# Altium PCB EE194_PCB.PcbDoc
Units mil, origin at the board's own origin, x right, y up, seen from the top; angles counter-clockwise.
Board outline 6000 x 4000 mil, 2 copper layers (Top Layer, Bottom Layer); 85 components, 41 nets, 267 pads, 366 vias.
Unrouted connection lines stored in the file: 91.
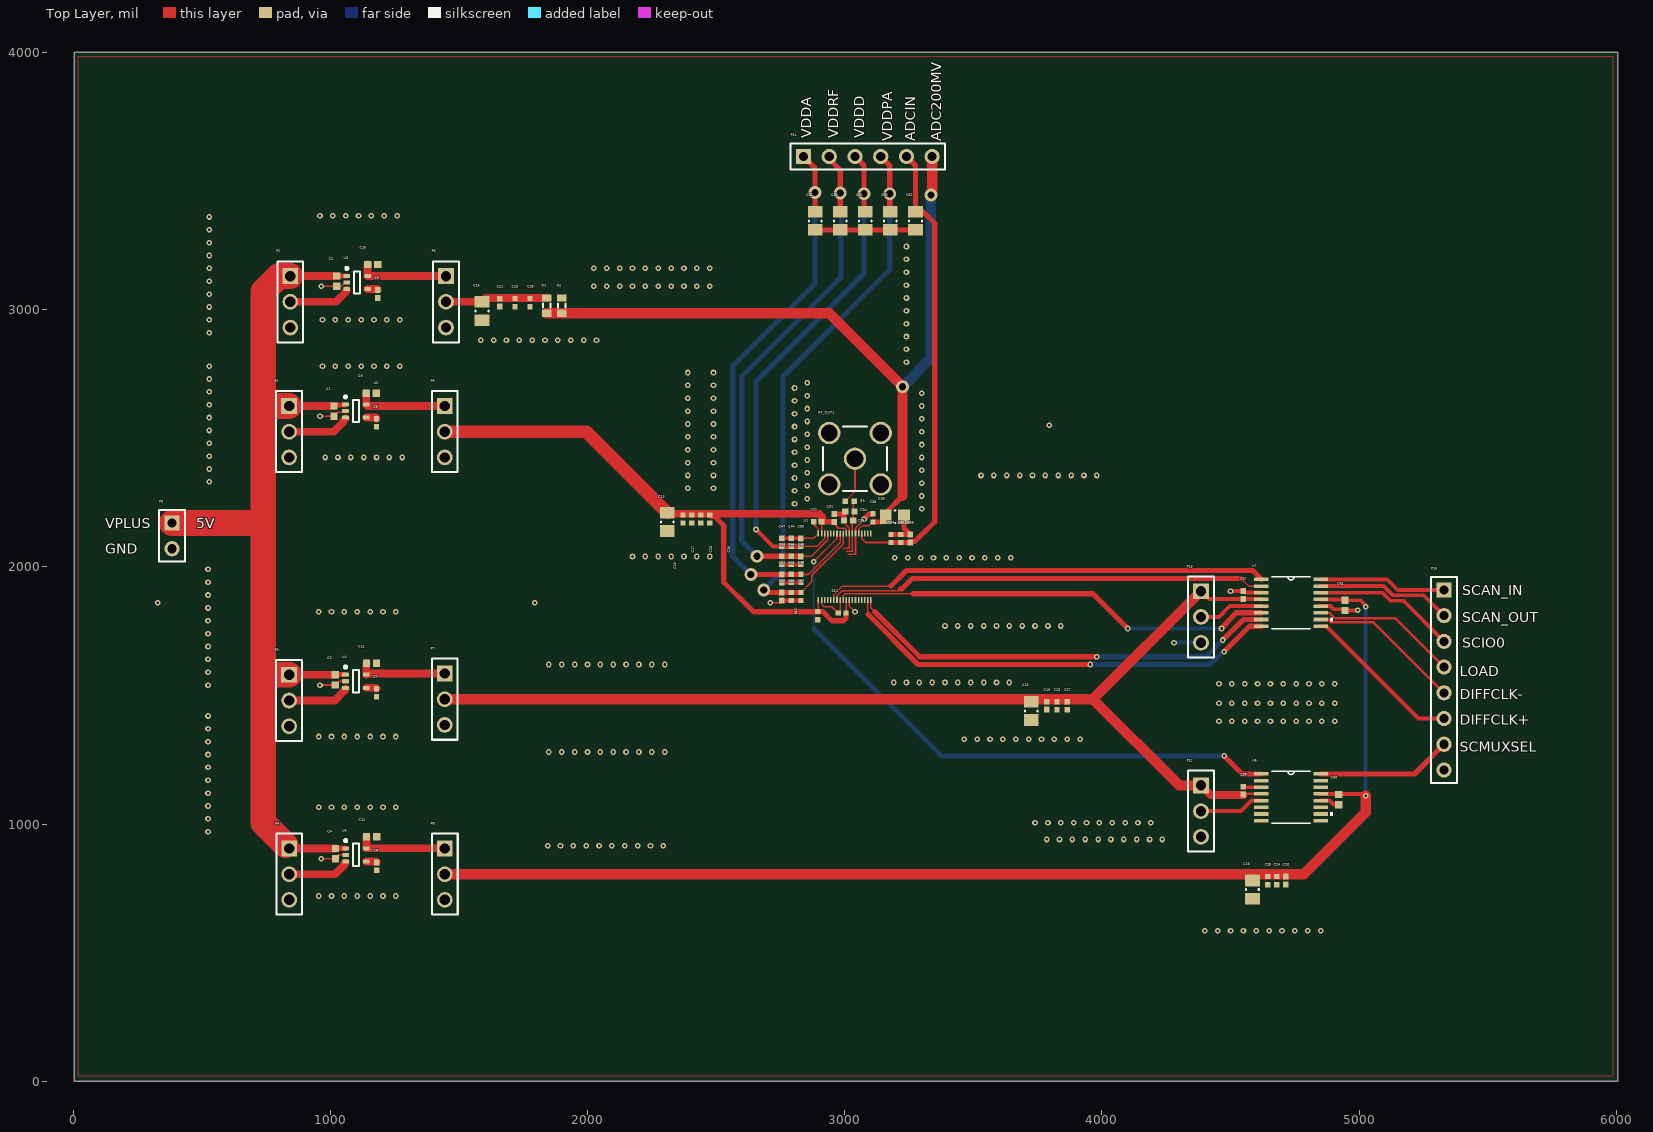
[diagram p0: Top Layer view]
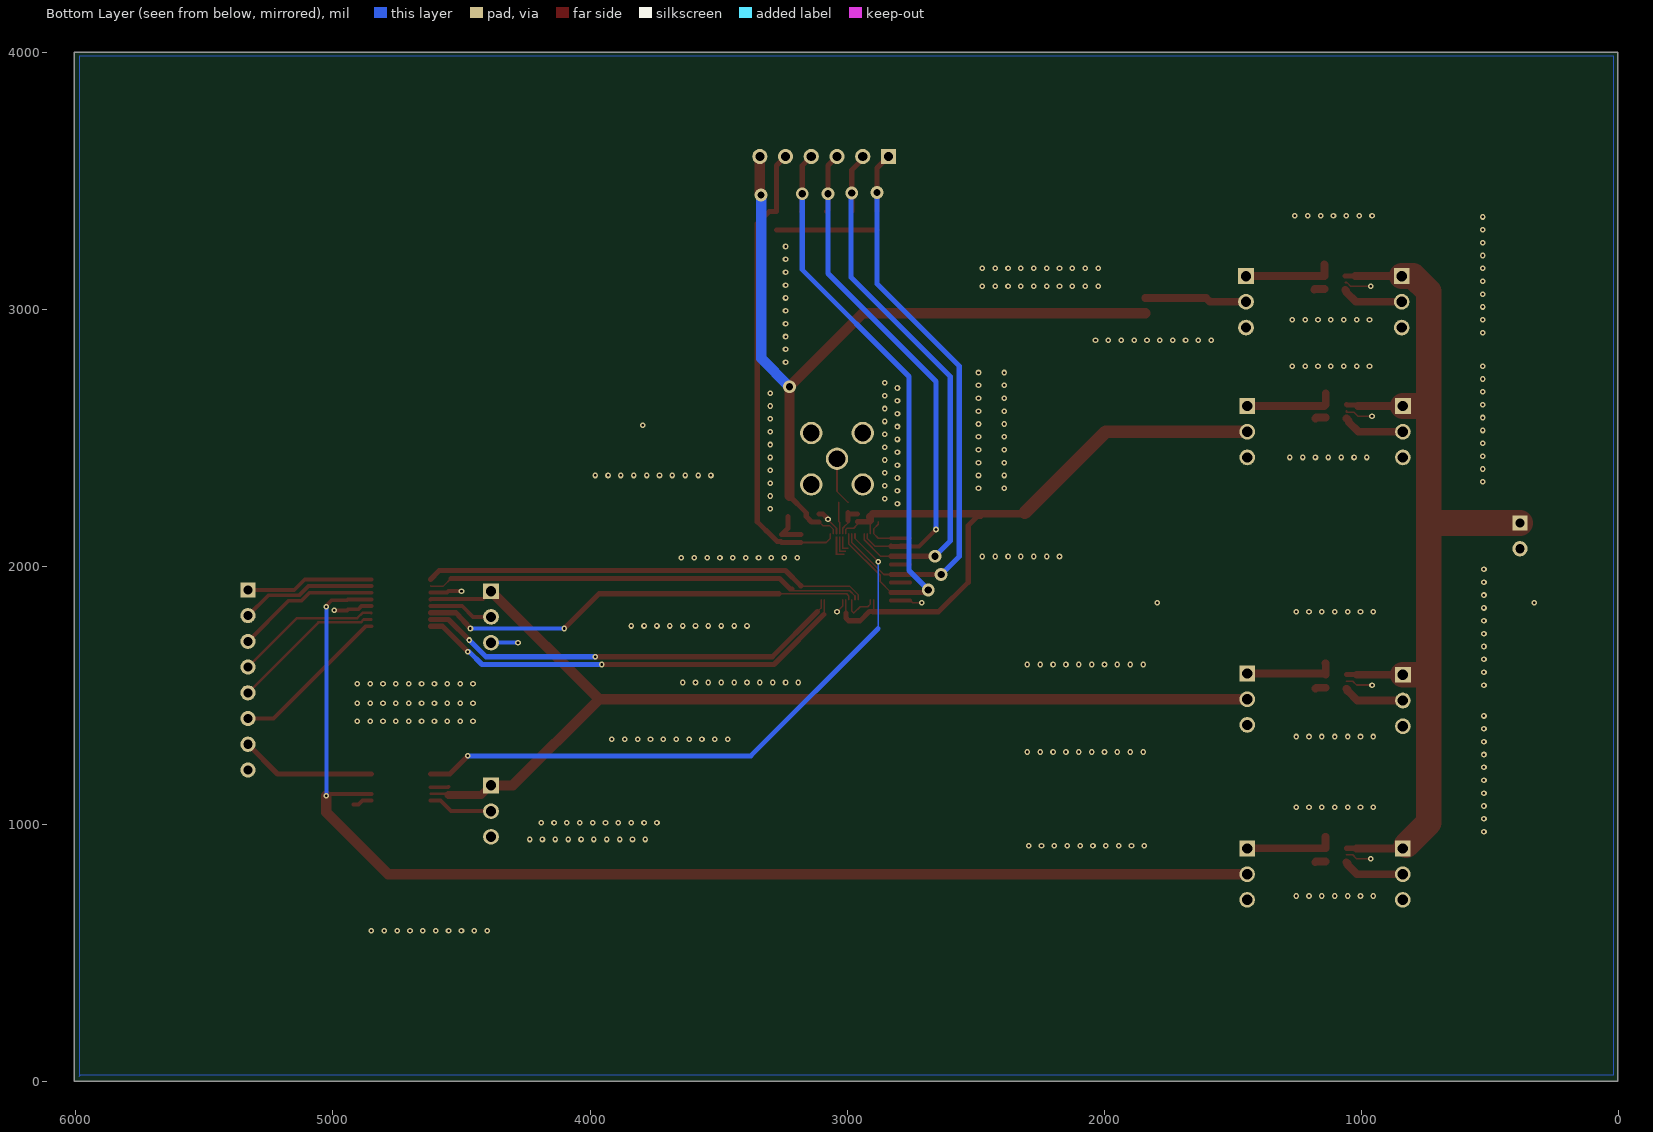
[diagram p1: Bottom Layer view, seen from below]

## Layer stack, top to bottom
Top Solder: solder mask 0.4, Solder Resist, Dk 3.5
Top Layer: signal copper 1.4
Dielectric 1: dielectric 12.6, FR-4, Dk 4.8
Bottom Layer: signal copper 1.4
Bottom Solder: solder mask 0.4, Solder Resist, Dk 3.5

## Board outline
5,0 6005,0 6005,4000 5,4000

## Design rules (kind name [scope] priority, off if disabled: settings)
Clearance [All] p1: gap=6 ignorepadtopadclearanceinfootprint=FALSE except(0: Arc-Hole Track-Hole SMDPad-Hole THPad-Hole Via-Hole Fill-Hole Poly-Hole Region-Hole Text-Hole)
HoleSize [All] p1: absolutevalues=TRUE maxlimit=100 minlimit=10 maxpercent=80.000 minpercent=20.000
MinimumSolderMaskSliver [All] p1: minsoldermaskwidth=5
PlaneConnect [All] p1: planeconnectstyle=Relief reliefexpansion=10 reliefentries=4 reliefconductorwidth=5 reliefairgap=5
PolygonConnect [All] p1: connectstyle=Relief reliefconductorwidth=10 reliefentries=4 polygonreliefangle="90 Angle" airgapwidth=10
RoutingVias [All] p1: holewidth=28 width=50 viastyle="Through Hole" minholewidth=10 minwidth=20 maxholewidth=28 maxwidth=50
SilkToSilkClearance [All] p1: silktosilkclearance=6
SilkToSolderMaskClearance [IsPad] p1: minsilkscreentomaskgap=6 clearancetoexposedcopper=TRUE
SolderMaskExpansion [All] p1: expansion=4
Width [All] p1: maxlimit=100 minlimit=5 preferedwidth=10
25 further rules are at their usual default settings.

## Components (designator, comment, footprint, x,y, rotation, side; value= is the part's Value field where it differs from the comment)
C1 "CAP 1uF 16V 0402(1005)" CAPC0402(1005)60_M 1015,2605 r90 top value=1uF
C2 "CAP 1uF 16V 0402(1005)" CAPC0402(1005)60_M 1025,3110.31 r90 top value=1uF
C3 "CAP 1uF 16V 0402(1005)" CAPC0402(1005)60_M 1020,1560 r90 top value=1uF
C4 "CAP 1uF 16V 0402(1005)" CAPC0402(1005)60_M 1020.63,885 r90 top value=1uF
C5 "GRM155R71H103KA88D" CAPC1005X55X25LL05T10 1180,2560 r90 top
C6 "GRM155R71H103KA88D" CAPC1005X55X25LL05T10 1185,3060.35 r90 top
C7 "GRM155R71H103KA88D" CAPC1005X55X25LL05T10 1180,1510 r90 top
C8 "GRM155R71H103KA88D" CAPC1005X55X25LL05T10 1180.63,835 r90 top
C9 "CAP 1uF 16V 0402(1005)" CAPC0402(1005)60_M 1159.69,2675 r180 top value=1uF
C10 "CAP 1uF 16V 0402(1005)" CAPC0402(1005)60_M 1165.32,3175 r180 top value=1uF
C11 "CAP 1uF 16V 0402(1005)" CAPC0402(1005)60_M 1160.32,1625 r180 top value=1uF
C12 "CAP 1uF 16V 0402(1005)" CAPC0402(1005)60_M 1160.95,950 r180 top value=1uF
C13 "CAP 10uF 25V 0805(2012)" CAPC0805(2012)145_N 2310,2174.57 r90 top value=10uF
C14 "CAP 10uF 25V 0805(2012)" CAPC0805(2012)145_N 1590,2994.33 r90 top value=10uF
C15 "CAP 10uF 25V 0805(2012)" CAPC0805(2012)145_N 3725,1440 r90 top value=10uF
C16 "CAP 10uF 25V 0805(2012)" CAPC0805(2012)145_N 4585,745 r90 top value=10uF
C17 "CAP 100pF 16V 0402(1005)" CAPC0402(1005)60_L#1 2405.69,2185.75 r90 top value=100pF
C18 "CAP 1nF 16V 0402(1005)" CAPC0402(1005)60_L#1 2371.03,2185.75 r90 top value=1nF
C19 "0402ZD104KAT2A" CAPC1005X56X25LL10T15#1 3785,1460 r90 top
C20 "0402ZD104KAT2A" CAPC1005X56X25LL10T15#1 4715,780 r90 top
C21 "0402ZD104KAT2A" CAPC1005X56X25LL10T15#1 1659.72,3026.73 r90 top
C22 "0402ZD104KAT2A" CAPC1005X56X25LL10T15#1 2895,2175 r0 top
C23 "CAP 100pF 16V 0402(1005)" CAPC0402(1005)60_L#1 3825,1460 r90 top value=100pF
C24 "CAP 100pF 16V 0402(1005)" CAPC0402(1005)60_L#1 4680,780 r90 top value=100pF
C25 "CAP 100pF 16V 0402(1005)" CAPC0402(1005)60_L#1 1718.07,3026.73 r90 top value=100pF
C26 "CAP 100pF 16V 0402(1005)" CAPC0402(1005)60_L#1 2440.34,2185.75 r90 top value=100pF
C27 "CAP 1nF 16V 0402(1005)" CAPC0402(1005)60_L#1 3865,1460 r90 top value=1nF
C28 "CAP 1nF 16V 0402(1005)" CAPC0402(1005)60_L#1 4645,780 r90 top value=1nF
C29 "CAP 1nF 16V 0402(1005)" CAPC0402(1005)60_L#1 1776.42,3026.73 r90 top value=1nF
C30 "CAP 1nF 16V 0402(1005)" CAPC0402(1005)60_L#1 2475,2185.75 r90 top value=1nF
C31 "0402ZD104KAT2A" CAPC1005X56X25LL10T15#1 2960,2190 r270 top
C32 "0402ZD104KAT2A" CAPC1005X56X25LL10T15#2 2990,1820 r0 top
C33 "CAP 10uF 25V 0805(2012)" CAPC0805(2012)145_N 3195,2195 r180 top value=10uF
C34 "CAP 4.7nF 16V 0402(1005)" CAPC0402(1005)60_N 3020,2215 r0 top value=4.7nF
C35 "0402ZD104KAT2A" CAPC0402(1005)60_L#2 2895,1810 r90 top
C36 "0402ZD104KAT2A" CAPC1005X56X25LL10T15#1 4550,1129.65 r270 top
C37 "0402ZD104KAT2A" CAPC1005X56X25LL10T15#1 4550,1890 r270 top
C38 "CAP 100pF 16V 0402(1005)" CAPC0402(1005)60_L#1 3110,2190 r270 top value=100pF
C39 "CAP 4.7nF 16V 0402(1005)" CAPC0402(1005)60_N 3015,2180 r0 top value=4.7nF
C40 "CAP 10uF 25V 0805(2012)" CAPC0805(2012)145_N 2982.5,3345 r90 top value=10uF
C41 "CAP 10uF 25V 0805(2012)" CAPC0805(2012)145_N 3080,3345 r90 top value=10uF
C42 "CAP 10uF 25V 0805(2012)" CAPC0805(2012)145_N 2885,3345 r90 top value=10uF
C43 "CAP 100pF 16V 0402(1005)" CAPC0402(1005)60_L#1 2755,2025 r90 top value=100pF
C44 "CAP 100pF 16V 0402(1005)" CAPC0402(1005)60_L#1 2792.5,2095 r270 top value=100pF
C45 "CAP 100pF 16V 0402(1005)" CAPC0402(1005)60_L#1 2792.5,1954.65 r90 top value=100pF
C46 "CAP 1nF 16V 0402(1005)" CAPC0402(1005)60_L#1 2792.5,2025 r90 top value=1nF
C47 "CAP 1nF 16V 0402(1005)" CAPC0402(1005)60_L#1 2755,2095 r270 top value=1nF
C48 "CAP 1nF 16V 0402(1005)" CAPC0402(1005)60_L#1 2830,1954.65 r90 top value=1nF
C49 "0402ZD104KAT2A" CAPC1005X56X25LL10T15#1 2830,2025 r90 top
C50 "0402ZD104KAT2A" CAPC1005X56X25LL10T15#1 2830,2095 r270 top
C51 "0402ZD104KAT2A" CAPC1005X56X25LL10T15#1 2755,1954.65 r90 top
C52 "CAP 10uF 25V 0805(2012)" CAPC0805(2012)145_N 3275,3345 r90 top value=10uF
C53 "CAP 10uF 25V 0805(2012)" CAPC0805(2012)145_N 3177.5,3345 r90 top value=10uF
C54 "CAP 100pF 16V 0402(1005)" CAPC0402(1005)60_L#1 3180,2110 r270 top value=100pF
C55 "CAP 100pF 16V 0402(1005)" CAPC0402(1005)60_L#1 2792.5,1884.65 r90 top value=100pF
C56 "CAP 1nF 16V 0402(1005)" CAPC0402(1005)60_L#1 3217.5,2110 r270 top value=1nF
C57 "CAP 1nF 16V 0402(1005)" CAPC0402(1005)60_L#1 2830,1884.65 r90 top value=1nF
C58 "0402ZD104KAT2A" CAPC1005X56X25LL10T15#1 3255,2110 r270 top
C59 "0402ZD104KAT2A" CAPC1005X56X25LL10T15#1 2755,1884.65 r90 top
C60 "CAP 1uF 16V 0402(1005)" CAPC0402(1005)60_M 4920,1095 r270 top value=1uF
C61 "CAP 1uF 16V 0402(1005)" CAPC0402(1005)60_M 4945,1850 r270 top value=1uF
P1 "TSW-103-07-F-S" SMTC-TSW-103-07-X-S 840,2625 r270 top
P2 "TSW-103-07-F-S" SMTC-TSW-103-07-X-S 845,3130 r270 top
P3 "TSW-103-07-F-S" SMTC-TSW-103-07-X-S 840,1580 r270 top
P4 "TSW-103-07-F-S" SMTC-TSW-103-07-X-S 840.63,905 r270 top
P5 "TSW-103-07-F-S" SMTC-TSW-103-07-X-S 1445,2625 r270 top
P6 "TSW-103-07-F-S" SMTC-TSW-103-07-X-S 1450,3130 r270 top
P7 "TSW-103-07-F-S" SMTC-TSW-103-07-X-S 1445,1585 r270 top
P8 "TSW-103-07-F-S" SMTC-TSW-103-07-X-S 1445.63,905 r270 top
P9 "Header 2" HDR1X2 385,2170 r270 top
P10 "Header 8" HDR1X8 5330,1910 r270 top
P11 "Header 6" HDR1X6 2840,3595 r0 top
P12 "TSW-103-07-F-S" SMTC-TSW-103-07-X-S 4385,1150 r270 top
P13 "TSW-103-07-F-S" SMTC-TSW-103-07-X-S 4385,1905 r270 top
R1 "Res3" J1-0603 1841.65,3015 r270 top value=5K
R2 "Res3" J1-0603 1900,3015 r270 top value=1K
R3 "ERJ-2GE0R00X" RESC1005X40X25NL05T05 3020,2255 r0 top
RF_OUT1 "32K101-400L5" ROS-32K101-400L5_V 3040,2420 r0 top
U1 "194_Digital" EE194_Analog_Chip 3000,2000 r0 top
U2 "TPS71712DCKR" DCK0005A_L 1099.65,2605.59 r0 top
U3 "TPS71712DCKR" DCK0005A_L 1104.65,3105 r0 top
U4 "TPS71709DCKR" DCK0005A_L 1099.65,1555 r0 top
U5 "TPS71733DCKR" DCK0005A_L 1100.28,880 r0 top
U6 "MAX13003EEUE-T" 21-0066J_16 4735,1103.82 r0 top value=Value
U7 "MAX13003EEUE-T" 21-0066J_16 4735,1860 r0 top value=Value

## Footprints (in the part's own frame and the unit in brackets; to place one, negate y for a bottom-side part, rotate by r counter-clockwise, add the part's x,y. Pads: shape width x height; smd on the part's side, far side on the other; paste and mask are expansions set on the pad)
21-0066J_16 [mil]
  rect 56x14 smd mask+3.5: 1(-115,91) 2(-115,65) 3(-115,39) 4(-115,13) 5(-115,-13) 6(-115,-39) 7(-115,-65) 8(-115,-91) 9(115,-91) 10(115,-65) 11(115,-39) 12(115,-13) 13(115,13) 14(115,39) 15(115,65) 16(115,91)
  silkscreen extent -74,-100 163,100
CAPC0402(1005)60_L#1 [mm] "Chip Capacitor, Body 1.0x0.5mm, Height 0.6mm, IPC High Density"
  rect 0.52x0.52 smd: 1(-0.4,0) 2(0.4,0)
  body extent -0.55,-0.3 0.55,0.3, height 0.6
CAPC0402(1005)60_L#2 [mm] "Chip Capacitor, Body 1.0x0.5mm, Height 0.6mm, IPC High Density"
  rect 0.52x0.52 smd mask+0.076: 1(-0.4,0) 2(0.4,0)
  body extent -0.55,-0.3 0.55,0.3, height 0.6
CAPC0402(1005)60_M [mm] "Chip Capacitor, Body 1.0x0.5mm, Height 0.6mm, IPC Low Density"
  rect 0.72x0.72 smd: 1(-0.5,0) 2(0.5,0)
  body extent -0.55,-0.3 0.55,0.3, height 0.6
CAPC0402(1005)60_N [mm] "Chip Capacitor, Body 1.0x0.5mm, Height 0.6mm, IPC Medium Density"
  rect 0.62x0.62 smd: 1(-0.45,0) 2(0.45,0)
  body extent -0.55,-0.3 0.55,0.3, height 0.6
CAPC0805(2012)145_N [mm] "Chip Capacitor, Body 2.0x1.2mm, Height 1.45mm, IPC Medium Density"
  rect 1.15x1.45 smd: 1(-0.9,0) 2(0.9,0)
  silkscreen extent -0.05,-0.62 0.05,0.63, body extent -1.1,-0.72 1.1,0.73, height 1.45
CAPC1005X55X25LL05T10 [mm] "Chip Capacitor, 2-Leads, Body 1.05x0.55mm, IPC High Density"
  rect 0.56x0.52 smd: 1(-0.39,0) 2(0.39,0)
  body extent -0.53,-0.28 0.53,0.28, height 0.55
CAPC1005X56X25LL10T15#1 [mm] "Chip Capacitor, 2-Leads, Body 1.10x0.60mm, IPC High Density"
  rect 0.58x0.54 smd: 1(-0.39,0) 2(0.39,0)
  body extent -0.55,-0.3 0.55,0.3, height 0.56
CAPC1005X56X25LL10T15#2 [mm] "Chip Capacitor, 2-Leads, Body 1.10x0.60mm, IPC High Density"
  rect 0.52x0.52 smd mask+0.066: 1(-0.39,0) 2(0.39,0)
  body extent -0.55,-0.3 0.55,0.3, height 0.56
DCK0005A_L [mm] "SOT23, 5-Leads, Body 2.15x1.4mm, Pitch 0.65mm, IPC High Density"
  rrect25% 0.65x0.4 smd: 1(-1.025,0.65) 2(-1.025,0) 3(-1.025,-0.65) 4(1.025,-0.65) 5(1.025,0.65)
  silkscreen extent -1.15,-1.1 0.3,1.52, body extent -1.14,-1 1.14,1, height 0.94
EE194_Analog_Chip [mil]
  rect 6x24 smd paste-3 mask-3: 1(-102,129) 2(-90,129) 3(-78,129) 4(-66,129) 5(-54,129) 6(-42,129) 7(-30,129) 8(-18,129) 9(-6,129) 10(6,129) 11(18,129) 12(30,129) 13(42,129) 14(54,129) 15(66,129) 16(78,129) 17(90,129) 18(102,129) 19(102,-129) 20(90,-129) 21(78,-129) 22(66,-129) 23(54,-129) 24(42,-129) 25(30,-129) 26(18,-129) 27(6,-129) 28(-6,-129) 29(-18,-129) 30(-30,-129) 31(-42,-129) 32(-54,-129) 33(-66,-129) 34(-78,-129) 35(-90,-129) 36(-102,-129)
  Top Layer region: 27,57 27,63 5,63 5,57
  Top Layer region: 39,45 39,51 10,51 10,45
  Top Layer region: 15,69 15,75 -5,75 -5,69
  Top Layer region: 21,117 15,117 15,69 21,69
  Top Layer region: 27,57 33,57 33,117 27,117
  Top Layer region: 45,117 39,117 39,45 45,45
HDR1X2 [mm] "Connector; Header; 2 Position"
  rect 1.5x1.5 hole 0.9: 1(0,0)
  round 1.5 hole 0.9: 2(2.54,0)
  silkscreen extent -1.27,-1.27 3.81,1.27
HDR1X6 [mm] "Connector; Header; 6 Position"
  rect 1.5x1.5 hole 0.9: 1(0,0)
  round 1.5 hole 0.9: 2(2.54,0) 3(5.08,0) 4(7.62,0) 5(10.16,0) 6(12.7,0)
  silkscreen extent -1.27,-1.27 13.97,1.27
HDR1X8 [mm] "Connector; Header; 8 Position"
  rect 1.5x1.5 hole 0.9: 1(0,0)
  round 1.5 hole 0.9: 2(2.54,0) 3(5.08,0) 4(7.62,0) 5(10.16,0) 6(12.7,0) 7(15.24,0) 8(17.78,0)
  silkscreen extent -1.27,-1.27 19.05,1.27
J1-0603 [mm] "Chip Resistor, Body 1.6x0.8mm, IPC High Density"
  rect 0.7x0.9 smd: 1(-0.75,0) 2(0.75,0)
  silkscreen extent -0.2,-0.35 0.2,0.35, body extent -0.85,-0.48 0.85,0.48, height 0.9
RESC1005X40X25NL05T05 [mm] "Chip Resistor, 2-Leads, Body 1.00x0.50mm, IPC Medium Density"
  rect 0.55x0.55 smd: 1(-0.45,0) 2(0.45,0)
  body extent -0.53,-0.27 0.53,0.28, height 0.4
ROS-32K101-400L5_V [mm] "SMA Straight Jack, 6.35x6.35x9.5mm, Rosenberger Recommended"
  round 2.2 hole 1.65: 1(0,0) MH(-2.54,-2.54) MH(-2.54,2.54) MH(2.54,-2.54) MH(2.54,2.54)
  silkscreen extent -3.17,-3.18 3.18,3.17, body extent -3.17,-3.17 3.18,3.18, height 9.5
SMTC-TSW-103-07-X-S [mm] ".025 SQ Post Terminal Strip Assembly, 1x3 Pins, Vertical, 2.54mm Pitch, Male"
  rect 1.55x1.55 hole 1.02: 1(0,0)
  round 1.55 hole 1.02: 2(2.54,0) 3(5.08,0)
  silkscreen extent -1.46,-1.27 6.54,1.27, body extent -1.27,-1.27 6.35,1.27, height 8.38

## Part data
C1 C2 C3 C4 C9 C10 C11 C12 C60 C61: library part CMP-1034-02119-1, "CAP 1uF 16V ±10% 0402 (1005 Metric) Thickness 0.6mm SMD", Case-EIA=0402, Case-Metric=1005, Rated Voltage="16 V", Tolerance=±10%, Max Thickness="0.6 mm", Technology=SMT
C5 C6 C7 C8: library part CMP-2008-04637-4, "Chip Capacitor, 10 nF, +/- 10%, 50 V, -55 to 125 degC, 0402 (1005 Metric), RoHS, Tape and Reel", Capacitance="10 nF", Case\/Package=0402, Case Code (Metric)=1005, Manufacturer="Basic Passives", Max Operating Temperature="125 degC", Min Operating Temperature="-55 degC", Package Quantity=10000, Tolerance=10%, Type (Capacitors)=X7R, Voltage Rating="50 V", Case Code (Imperial)=0402, ComponentLink1Description="Manufacturer URL", ComponentLink1URL=http://www.murata.com/, ComponentLink2Description=Datasheet, ComponentLink2URL=http://search.murata.co.jp/Ceramy/image/img/A01X/G101/ENG/GRM155R71H103KA88-01.pdf, DatasheetVersion=02/2016, Height="0.5 mm", Lead Pitch=2mm, Length="1 mm", Mount="Surface Mount", Mounting Technology="Surface Mount", PackageDescription="2-Pin Surface Mount Device, Body 1 x 0.5 mm", PackageReference=0402, Packaging="Tape and Reel", PartNumber=GRM155R71H103KA88D, Pins=2, Radiation Hardening=No, REACH SVHC="No SVHC", RoHSCompliant=true, Voltage Rating (DC)="50 V", Width="0.5 mm"
C13 C14 C15 C16 C33 C40 C41 C42 C52 C53: library part CMP-1036-04932-1, "CAP 10uF 25V ±10% 0805 (2012 Metric) Thickness 1.45mm SMD", Case-EIA=0805, Case-Metric=2012, Rated Voltage="25 V", Tolerance=±10%, Max Thickness="1.45 mm", Technology=SMT
C17 C23 C24 C25 C26 C38 C43 C44 C45 C54 C55: library part CMP-1034-01234-1, "CAP 100pF 16V ±1% 0402 (1005 Metric) Thickness 0.6mm SMD", Case-EIA=0402, Case-Metric=1005, Rated Voltage="16 V", Tolerance=±1%, Max Thickness="0.6 mm", Technology=SMT
C18 C27 C28 C29 C30 C46 C47 C48 C56 C57: library part CMP-1034-01615-1, "CAP 1nF 16V ±1% 0402 (1005 Metric) Thickness 0.6mm SMD", Case-EIA=0402, Case-Metric=1005, Rated Voltage="16 V", Tolerance=±1%, Max Thickness="0.6 mm", Technology=SMT
C19 C20 C21 C22 C31 C36 C37 C49 C50 C51 C58 C59: library part CMP-2008-02878-2, "Chip Capacitor, 0.1 uF, +/- 10%, 10 V, -55 to 85 degC, 0402 (1005 Metric), RoHS, Tape and Reel", Capacitance="100 nF", Case\Package=0402, Case Code (Metric)=1005, Max Operating Temperature="85 degC", Min Operating Temperature="-55 degC", Package Quantity=1, Tolerance=10%, Type (Capacitors)=X5R, Voltage Rating="10 V", Case Code (Imperial)=0402, ComponentLink1Description="Manufacturer URL", ComponentLink1URL=http://www.avx.com/, ComponentLink2Description=Datasheet, ComponentLink2URL=http://datasheets.avx.com/cx5r.pdf, DatasheetVersion=05/2016, Height="0.56 mm", Length="1 mm", Mount="Surface Mount", Mounting Technology="Surface Mount", PackageDescription="2-Pin Surface Mount Device, Body 1 x 0.5 mm", PackageReference=0402, Packaging="Cut Tape", Pins=2, Radiation Hardening=No, REACH SVHC="No SVHC", RoHSCompliant=true, Voltage Rating (DC)="10 V", Width="0.5 mm"
C32 C35: library part CAP-NP-2, "Chip Capacitor, 0.1 uF, +/- 10%, 10 V, -55 to 85 degC, 0402 (1005 Metric), RoHS, Tape and Reel", Capacitance="100 nF", Case\Package=0402, Case Code (Metric)=1005, Max Operating Temperature="85 degC", Min Operating Temperature="-55 degC", Package Quantity=1, Tolerance=10%, Type (Capacitors)=X5R, Voltage Rating="10 V", Case Code (Imperial)=0402, ComponentLink1Description="Manufacturer URL", ComponentLink1URL=http://www.avx.com/, ComponentLink2Description=Datasheet, ComponentLink2URL=http://datasheets.avx.com/cx5r.pdf, DatasheetVersion=05/2016, Height="0.56 mm", Length="1 mm", Mount="Surface Mount", Mounting Technology="Surface Mount", PackageDescription="2-Pin Surface Mount Device, Body 1 x 0.5 mm", PackageReference=0402, Packaging="Cut Tape", Pins=2, Radiation Hardening=No, REACH SVHC="No SVHC", RoHSCompliant=true, Voltage Rating (DC)="10 V", Width="0.5 mm"
C34 C39: library part CMP-1034-01810-1, "CAP 4.7nF 16V ±10% 0402 (1005 Metric) Thickness 0.6mm SMD", Case-EIA=0402, Case-Metric=1005, Rated Voltage="16 V", Tolerance=±10%, Max Thickness="0.6 mm", Technology=SMT
P1 P2 P3 P4 P5 P6 P7 P8 P12 P13: library part CMP-1024-00331-1, "0.025\" SQ Post Header, Through-hole, Vertical, -55 to 125 degC, 2.54 mm Pitch, 3-Pin, Male, RoHS", Manufacturer=Samtec, Temperature Range="-55 to 125 degC", ComponentLink1Description="Manufacturer URL", ComponentLink1URL=http://www.samtec.com, ComponentLink2Description=Datasheet, ComponentLink2URL=http://www.samtec.com/documents/webfiles/pdf/TSW_TH.PDF, ComponentLink3Description="Package Specification", ComponentLink3URL=http://www.samtec.com/documents/webfiles/cpdf/TSW-XXX-XX-XXX-X-XX-XXX-MKT.pdf, DatasheetVersion=F-214, Mounting Technology=Through-hole, Orientation=Vertical, PackageDescription=".025[0.64] SQ. Post Terminal Strip Assembly", PackageReference=TSW-103-07-X-S, PackageVersion="DM, 8/1988", PartNumber=TSW-103-07-F-S, Pitch="2.54 mm", RoHS=True
P9: "Header, 2-Pin", LatestRevisionDate=17-Jul-2002, LatestRevisionNote="Re-released for DXP Platform.", Publisher="Altium Limited"
P10: "Header, 8-Pin", LatestRevisionDate=17-Jul-2002, LatestRevisionNote="Re-released for DXP Platform.", Publisher="Altium Limited"
P11: "Header, 6-Pin", LatestRevisionDate=17-Jul-2002, LatestRevisionNote="Re-released for DXP Platform.", Publisher="Altium Limited"
R1 R2: "Resistor", LatestRevisionDate=29-May-2009, LatestRevisionNote="IPC-7351 Footprint Added.", PackageDescription="Chip Resistor", PackageReference=J1-0603, Published=8-Jun-2000, Publisher="Altium Limited"
R3: library part CMP-2002-00429-2, "Chip Resistor, 0 Ohm, +/- 5%, 100 mW, -55 to 155 degC, 0402 (1005 Metric), RoHS, Tape and Reel", Case/Package=0402, Case Code (Metric)=1005, Max Operating Temperature="155 degC", Min Operating Temperature="-55 degC", Package Quantity=10000, Power Rating="100 mW", Resistance="0 Ohm", Tolerance=5%, Voltage Rating="50 V", Case Code (Imperial)=0402, ComponentLink1Description=Datasheet, ComponentLink1URL=http://industrial.panasonic.com/cdbs/www-data/pdf/RDA0000/AOA0000C84.pdf, Height="0.35 mm", Length="1 mm", Mount="Surface Mount", Mounting Technology="Surface Mount", PackageDescription="2-Pin Surface Mount Device, Body 1 x 0.5 mm", Packaging="Tape and Reel", PartNumber=ERJ-2GE0R00X, REACH SVHC=Unknown, RoHSCompliant=True, Width="0.5 mm"
RF_OUT1: library part CMP-0751-00001-1, "SMA Straight Jack, Up to 18 GHz, -55 to 155 degC", Manufacturer=Rosenberger, ComponentLink1Description="Manufacturer URL", ComponentLink1URL=http://www.rosenberger.de, ComponentLink2Description=Datasheet, ComponentLink2URL=http://rosenberger.de/ok/images/documents/db/32K101-400L5.pdf, ComponentLink3Description="Package Specification", ComponentLink3URL=http://rosenberger.de/ok/images/documents/db/32K101-400L5.pdf, ComponentLink4Description="Series Overview / Design Note", ComponentLink4URL=http://rosenberger.de/ok/images/documents/spez/32.pdf, ComponentLink5Description="Webshop / RFQ", ComponentLink5URL=http://www.rosenberger.com/en/contact/sales/, DatasheetVersion=a00, Design Note="Footprint in library is a generic example - only application specific footprint delivers High Performance", Mounting Technology="Through Hole", PackageDescription="SMA Straight Jack, 6.35 x 6.35 x 9.5 mm", PackageReference=32K101-400L5, PackageVersion=a00, PartNumber=32K101-400L5
U2 U3: library part CMP-0394-00837-2, "Single Output High PSRR LDO, 150 mA, Fixed 1.2 V Output, 2.5 to 6.5 V Input, 5-pin SC70 (DCK), -40 to 125 degC, Green (RoHS & no Sb/Br)", Manufacturer="Texas Instruments", Accuracy(%)=3, Code_JEDEC=MO-203, ComponentLink1Description="Manufacturer URL", ComponentLink1URL=http://www.ti.com/, ComponentLink2Description=Datasheet, ComponentLink2URL=http://www.ti.com/general/docs/lit/getliterature.tsp?genericPartNumber=TPS71712&fileType=pdf, ComponentLink3Description="Package Specification", ComponentLink3URL=http://www.ti.com/litv/pdf/mpds025f, DatasheetVersion=SBVS068G, Eco-Plan="Green (RoHS & no Sb/Br)", Fixed Output Options(V)=1.2, Iout(Max)(A)=0.15, Iq(Typ)(mA)=0.05, Mounting Technology="Surface Mount", PackageDescription="5-Pin Plastic Small-Outline, Body 2 x 1.25 mm, Pitch 0.65 mm", PackageReference=DCK0005A, PackageVersion=4093553-3/G, PartNumber=TPS71712DCKR, SubFamily="Single Channel LDO", Vdo(Typ)(mV)=170, Vin(Max)(V)=6.5, Vin(Min)(V)=2.5, Vout Adj(Max)(V)=1.2, Vout Adj(Min)(V)=1.2
U4 U5: library part CMP-0394-00837-2, "Single Output High PSRR LDO, 150 mA, Fixed 1.2 V Output, 2.5 to 6.5 V Input, 5-pin SC70 (DCK), -40 to 125 degC, Green (RoHS & no Sb/Br)", Manufacturer="Texas Instruments", PartNumber=TPS71712DCKR, Accuracy(%)=3, Code_JEDEC=MO-203, ComponentLink1Description="Manufacturer URL", ComponentLink1URL=http://www.ti.com/, ComponentLink2Description=Datasheet, ComponentLink2URL=http://www.ti.com/general/docs/lit/getliterature.tsp?genericPartNumber=TPS71712&fileType=pdf, ComponentLink3Description="Package Specification", ComponentLink3URL=http://www.ti.com/litv/pdf/mpds025f, DatasheetVersion=SBVS068G, Eco-Plan="Green (RoHS & no Sb/Br)", Fixed Output Options(V)=1.2, Iout(Max)(A)=0.15, Iq(Typ)(mA)=0.05, Mounting Technology="Surface Mount", PackageDescription="5-Pin Plastic Small-Outline, Body 2 x 1.25 mm, Pitch 0.65 mm", PackageReference=DCK0005A, PackageVersion=4093553-3/G, SubFamily="Single Channel LDO", Vdo(Typ)(mV)=170, Vin(Max)(V)=6.5, Vin(Min)(V)=2.5, Vout Adj(Max)(V)=1.2, Vout Adj(Min)(V)=1.2
U6 U7: "Imported", Manufacturer_Name=Maxim, Manufacturer_Part_Number=MAX13003EEUE-T, RefDes=RefDes, Type=Type, Vendor=Maxim

## Via types
v1: diameter 22, hole 10, Top Layer to Bottom Layer, 357 vias
v2: diameter 50, hole 28, Top Layer to Bottom Layer, 9 vias

## Nets (pads, with @x,y where several pads share a name; then routed paths per layer and width w, separated by ;. In a path a pad name is that pad's centre, name@x,y a point inside that pad or via, vN(x,y) a via of type N, cw(c..) or ccw(c..) an arc to the next point about the centre after c; other vN are vias at no path point)
ADC200MV: C33.2 C38.2 P11.6 R1.2 R2.2 U1.14 | length 3118.4
  Top Layer w6: U1.14 3054,2144.73 3069.27,2160 3095.75,2160 C38.2
  Top Layer w20: C38.2 3138.82,2174.25 C33.2 3159.57,2209.57 3225,2275
  Top Layer w40: R1.2 R2.2 2939.53,2985.47 v2(3225,2700) 3225,2275 ; v2(3335,3445) 3340,3450 P11.6
  Bottom Layer w40: v2(3225,2700) 3335,2810 v2(3335,3445)
ADCIN: C52.2 C54.2 C56.2 C58.2 P11.5 U1.15 | length 1826
  Top Layer w6: U1.15 3066,2109.76 3081.51,2094.25 C54.2
  Top Layer w20: C54.2 C56.2 3254.61,2094.25 C58.2 3258.29,2097.94 3272.26,2097.94 3314.32,2140 3315,2140 3350,2175 3350,3335 3304.57,3380.43 C52.2 3275,3560 P11.5
ANT: C34.2 C39.2 R3.2 U1.12 | length 122.1
  Top Layer w6: U1.12 3030,2172.28 3032.72,2175 3032.72,2210 R3.2@3032.72,2250
DIFFCLK+: U1.20 U7.8 | length 1728.5
  Top Layer w6: 3090,1815 U1.20
  Top Layer w20: 3090,1815 3285,1620 v1(3955,1620) ; v1(4475,1670) 4574,1769 U7.8
  Bottom Layer w20: v1(3955,1620) 4420,1620 4470,1670 v1(4475,1670)
DIFFCLK+33: P10.6 U7.9 | length 628.7
  Top Layer w15: U7.9 4871,1769 5230,1410 P10.6
DIFFCLK-: U1.19 U7.7 | length 1687.9
  Top Layer w6: U1.19 3102,1839.77 3115.88,1825.88
  Top Layer w20: 3115.88,1825.88 3291.77,1650 v1(3980,1650) ; v1(4470,1715) 4550,1795 U7.7
  Bottom Layer w20: v1(3980,1650) 4405,1650 v1(4470,1715)
DIFFCLK-33: P10.5 U7.10 | length 598.1
  Top Layer w10: U7.10 4880,1795 4891,1784 5056,1784 P10.5
GND: C1.1 C2.1 C3.1 C4.1 C5.1 C6.1 C7.1 C8.1 C9.1 C10.1 C11.1 C12.1 C13.1 C14.1 C15.1 C16.1 C17.1 C18.1 C19.1 C20.1 C21.1 C22.1 C23.1 C24.1 C25.1 C26.1 C27.1 C28.1 C29.1 C30.1 C31.1 C32.1 C33.1 C34.1 C35.1 C36.1 C37.1 C38.1 C39.1 C40.1 C41.1 C42.1 C43.1 C44.1 C45.1 C46.1 C47.1 C48.1 C49.1 C50.1 C51.1 C52.1 C53.1 C54.1 C55.1 C56.1 C57.1 C58.1 C59.1 C60.2 C61.2 P1.3 P2.3 P3.3 P4.3 P5.3 P6.3 P7.3 P8.3 P9.2 P12.3 P13.3 R2.1 RF_OUT1.MH U1.1 U1.11 U1.13 U1.26 U1.29 U1.35 U2.2 U3.2 U4.2 U5.2 U6.3 U6.12 U7.3 U7.12 | length 2422
  Top Layer w6: v1(960,1540) 960.32,1540.32 C3.1 1034.68,1555 U4.2 ; v1(960.32,2585.32) C1.1 1031.2,2601.51 1059.29,2601.51 U2.2 ; v1(965.32,865.32) C4.1 1035.32,880 U5.2 ; v1(965.63,3090.63) C2.1 1043.27,3090.63 1057.64,3105 U3.2 ; v1(2710,1860) 2745.71,1860 C59.1 ; C50.1@2829.61,2110.75 2879.75,2110.75 U1.1 2898,2147 2879.65,2165.35 C22.1 ; U1.35 2910,1855 2920,1845 2949.65,1845 C32.1 2982,1827.35 U1.29 ; C39.1@2992.28,2175 3005.28,2162 3005.7,2162 3018,2149.7 U1.11 ; U1.26 3018,1847 v1(3040,1825) ; U1.13 3042,2149.7 3075,2182.7 v1(3075,2185.15)
  Top Layer w15: C59.1 2829.61,1869.29 C57.1 ; C51.1 2829.61,1939.29 C48.1 ; C43.1 C46.1 2829.61,2009.25 C49.1 ; C47.1 C44.1 C50.1@2829.61,2110.75 ; v1(4499.65,1905.35) C37.1 4555.79,1899.56 4620,1899.56 U7.3 ; C36.1 4552.18,1142.82 U6.3 ; U6.12 4884.18,1090.82 4899.69,1075.31 C60.2 ; U7.12 4888,1847 4900,1835 4940.31,1835 C61.2 v1(4994.69,1830.31)
  Top Layer w20: C42.1 C40.1 C41.1 C53.1 C52.1 ; C31.1 2992.64,2205.35 2997.28,2210 C39.1 ; v1(3075,2185.15) 3095.6,2205.75 C38.1 ; C54.1 C56.1 C58.1@3254.61,2125.75 ; C33.1 3230.43,2149.92 C58.1@3254.61,2125.75 ; C58.1 C58.1@3254.61,2125.75
  Bottom Layer w6: v1@955,2580 v1(960.32,2585.32)
  Bottom Layer w15: v1(4280,1705) P13.3
  other v1: 330,1860 1795,1860
LOAD: U1.28 U7.6 | length 1727.9
  Top Layer w6: U1.28 2994,1886.73 3002.27,1895 3265,1895
  Top Layer w20: 3265,1895 3965,1895 v1(4100,1760) ; v1(4465,1760) 4521,1821 U7.6
  Bottom Layer w15: v1(4100,1760) v1(4465,1760)
LOAD33: P10.4 U7.11 | length 568.8
  Top Layer w10: U7.11@4851,1820 U7.11 4884,1821 4905,1800 5140,1800 P10.4
NetC5_2: C5.2 U2.4 | length 41.4
  Top Layer w30: U2.4 1176.67,2580 C5.2@1180,2576.67
NetC6_2: C6.2 U3.4 | length 41
  Top Layer w30: U3.4 1182.61,3079.41 C6.2@1185,3077.02
NetC7_2: C7.2 U4.4 | length 41.1
  Top Layer w30: U4.4 1177.26,1529.41 C7.2@1180,1526.67
NetC8_2: C8.2 U5.4 | length 41.1
  Top Layer w30: U5.4 1177.89,854.41 C8.2@1180.63,851.67
NetC9_2: C9.2 P5.1 U2.5 | length 351.4
  Top Layer w30: C9.2 U2.5 1146.18,2625 P5.1
NetC10_2: C10.2 P6.1 U3.5 | length 349.9
  Top Layer w30: C10.2 1145,3174.37 U3.5 1145.59,3130 P6.1
NetC11_2: C11.2 P7.1 U4.5 | length 351.5
  Top Layer w30: C11.2 1140,1624.37 U4.5 1144.41,1585 P7.1
NetC12_2: C12.2 P8.1 U5.5 | length 349.9
  Top Layer w30: C12.2 1141.26,906.22 U5.5 1445.04,905.59 P8.1
NetC14_2: C14.2 C21.2 C25.2 C29.2 P6.2 R1.1 | length 397.9
  Top Layer w30: P6.2 1589.76,3030 C14.2 1604.76,3044.53 R1.1
NetP1_2: P1.2 U2.3 | length 243.7
  Top Layer w30: P1.2 1012.73,2525 1050.17,2562.44 1050.17,2567.6 U2.3@1059.29,2576.72
NetP2_2: P2.2 U3.3 | length 240.9
  Top Layer w30: P2.2 1022.42,3030 1060.17,3067.76 1060.17,3072.01 U3.3@1064.29,3076.13
NetP3_2: P3.2 U4.3 | length 241.1
  Top Layer w30: P3.2 1017.73,1480 1055.17,1517.44 1055.17,1522.01 U4.3@1059.29,1526.13
NetP4_2: P4.2 U5.3 | length 241.1
  Top Layer w30: P4.2 1018.36,805 1055.8,842.44 1055.8,847.01 U5.3@1059.92,851.13
NetP12_2: P12.2 U6.5 | length 251.9
  Top Layer w15: P12.2 4540,1050 4580.82,1090.82 U6.5
NetP13_2: P13.2 U7.5 | length 252.4
  Top Layer w15: P13.2 4455,1805 4497,1847 U7.5
NetR3_1: R3.1 RF_OUT1.1 | length 187.7
  Top Layer w6: R3.1@2997.28,2250 3040,2292.72 RF_OUT1.1
SC_MUX_SEL: U1.7 U6.1 | length 2380.4
  Top Layer w6: v1(2880,2020) 2970,2110 U1.7
  Top Layer w20: v1(4475,1265) 4545.18,1194.82 U6.1
  Bottom Layer w6: 2880,1760 v1(2880,2020)
  Bottom Layer w20: 2880,1760 3375,1265 v1(4475,1265)
SC_MUX_SEL33: P10.7 U6.16 | length 527.7
  Top Layer w20: U6.16 5214.82,1194.82 P10.7
SCAN_IN: U1.31 U7.1 | length 1735.4
  Top Layer w6: U1.31 2958,1891.7 2991.3,1925 3179,1925 3180,1926
  Top Layer w20: 3180,1926 3181,1926 3240,1985 4586,1985 U7.1
SCAN_IN33: P10.1 U7.16 | length 497
  Top Layer w15: U7.16 5109,1951 5150,1910 P10.1
SCAN_OUT: U1.30 U7.2 | length 1704.3
  Top Layer w6: U1.30 2970,1886.73 2990.27,1907 3215,1907 ; 4540,1955 4570,1925 U7.2 U7.2@4620,1925.77
  Top Layer w20: 3215,1914 3222,1914 3263,1955 4540,1955
SCAN_OUT33: P10.2 U7.15 | length 527.6
  Top Layer w15: U7.15 5095,1925 5131,1889 5251,1889 P10.2
SCIO0133: P10.3 U7.14 | length 558.3
  Top Layer w15: U7.14 5091.3,1899 5122.3,1868 5172,1868 P10.3
VBAT: C13.2 C17.2 C18.2 C22.2 C26.2 C30.2 C31.2 C32.2 C35.2 P5.2 U1.2 U1.10 U1.27 U1.36 | length 2745.5
  Top Layer w6: U1.36 2898,1826.25 2898.5,1825.75 C35.2@2899.25,1825 ; U1.2 C22.2@2910,2174.65 ; C31.2 2960,2165 2975,2150 3000.73,2150 3006,2144.73 U1.10 ; C32.2@3006,1828.65 U1.27
  Top Layer w20: C30.2 2480.26,2196.24 2493.76,2196.24 2530,2160 2530,1940 2645,1825 C35.2@2899.25,1825 ; C35.2 2898.5,1825.75 2914.25,1825.75 2950,1790 2995,1790 3005.35,1800.35 C32.2 ; 2907.06,2192.26 2907.06,2177.58 C22.2@2910,2174.65 ; C22.2@2912.06,2175 2959.65,2175 C31.2
  Top Layer w30: C13.2 2313.37,2206.63 2440.34,2206.63 2899.76,2206.63 2912.06,2194.33 2912.06,2192.26
  Top Layer w50: P5.2 1995,2525 C13.2
VDD_09V: C15.2 C19.2 C23.2 C27.2 C36.2 C37.2 P7.2 P12.1 P13.1 U6.4 U7.4 | length 4172.5
  Top Layer w10: C36.2 4552.53,1116.82 U6.4
  Top Layer w15: P13.1 4415.35,1874.65 C37.2 4618.35,1874.65 U7.4
  Top Layer w30: P12.1 4422.42,1112.58 C36.2@4550,1112.58
  Top Layer w40: P7.2 3965,1485 ; P12.1 4300,1150 3965,1485 ; P13.1 3965,1485
VDD_33V: C16.2 C20.2 C24.2 C28.2 C60.1 C61.1 P8.2 U6.13 U7.13 | length 4846.1
  Top Layer w15: U6.13 5018.18,1116.82 v1(5025,1110) ; U7.13 4941.69,1873 C61.1 5005.31,1869.68 5025,1850 v1(5025,1845)
  Top Layer w40: P8.2 4785,805 5025,1045 v1(5025,1110)
  Bottom Layer w15: v1(5025,1110) v1(5025,1845)
VDDA: C42.2 C45.2 C48.2 C51.2 P11.1 U1.8 | length 2313.3
  Top Layer w6: C48.2@2829.61,1970 2858.28,1970 2982,2093.72 U1.8
  Top Layer w20: v2(2635,1970) C51.2 C48.2@2829.61,1970 ; P11.1 2885,3550 v2(2885,3455) C42.2
  Bottom Layer w20: v2(2635,1970) 2565,2040 2565,2780 2885,3100 v2(2885,3455)
VDDD_OUT: C41.2 C44.2 C47.2 C50.2 P11.3 U1.3 | length 2042.3
  Top Layer w6: C44.2 C44.2@2792.89,2079.65 ; C50.2 2891.89,2079.65 2922,2109.76 U1.3
  Top Layer w15: v1(2655,2145) 2720.75,2079.25 C47.2
  Top Layer w20: C47.2 2755.39,2079.65 C44.2@2792.89,2079.65 ; C44.2 2829.61,2079.25 C50.2 ; P11.3 3075,3560 v2(3075,3450) 3075,3385.43 C41.2
  Bottom Layer w20: v1(2655,2145) 2655,2720 3075,3140 v2(3075,3450) v2@3075,3455
VDDPA: C53.2 C55.2 C57.2 C59.2 P11.4 U1.9 | length 2428.9
  Top Layer w6: C57.2 2872,1942.39 2872,1966.75 2994,2088.75 U1.9
  Top Layer w20: v2(2685,1910) 2695,1900 C59.2 2829.61,1900 C57.2 ; P11.4 3175,3560 v2(3175,3450) 3175,3382.93 C53.2
  Bottom Layer w20: v2(2685,1910) 2695,1910 2690,1915 2760,1985 2760,2740 3175,3155 v2(3175,3450)
VDDRF_OUT: C40.2 C43.2 C46.2 C49.2 P11.2 U1.4 | length 2159.8
  Top Layer w6: C49.2 2869.57,2040.35 2934,2104.79 U1.4
  Top Layer w20: v2(2659.25,2040.75) C43.2 C46.2 2829.61,2040.75 C49.2 ; P11.2 2940,3585 2982.5,3542.5 v2(2982.5,3452.5) C40.2
  Bottom Layer w20: v2(2659.25,2040.75) 2600,2100 2600,2740 2985,3125 2985,3455 v2(2982.5,3452.5)
VPOS: C1.2 C2.2 C3.2 C4.2 P1.1 P2.1 P3.1 P4.1 P9.1 U2.1 U3.1 U4.1 U5.1 | length 3780.1
  Top Layer w20: C1.2 1015,2629.46 1057.57,2629.46 U2.1 ; C3.2 1020.91,1580.59 U4.1 ; C4.2 1021.54,905.59 U5.1 ; C2.2 1025.59,3130.59 U3.1
  Top Layer w30: P4.1@827.5,917.5 840,905 P4.1 840.94,904.69 C4.2 ; P3.1 1019.69,1580 C3.2 ; P1.1 1014.69,2625 C1.2 ; P2.1 C2.2
  Top Layer w100: P9.1 735,2170 740,2175 ; P4.1@827.5,917.5 740,1005 740,1580 ; P3.1 740,1580 ; P1.1 745,2625 740,2630 ; P2.1 800,3130 740,3070 740,2630 ; 740,1580 740,2175 ; 740,2175 740,2630
pads on no net: P10.8 U1.5 U1.6 U1.16 U1.17 U1.18 U1.21 U1.22 U1.23 U1.24 U1.25 U1.32 U1.33 U1.34 U6.2 U6.6 U6.7 U6.8 U6.9 U6.10 U6.11 U6.14 U6.15
copper on no net:
  other v1: 4400,585 4450,585 4500,585 4550,585 4600,585 4650,585 4700,585 4750,585 4800,585 4850,585 955,720 1005,720 1055,720 1105,720 1155,720 1205,720 1255,720 1845,915 1895,915 1945,915 1995,915 2045,915 2095,915 2145,915 2195,915 2245,915 2295,915 3785,940 3835,940 3885,940 3935,940 3985,940 4035,940 4085,940 4135,940 4185,940 4235,940 525,970 3740,1005 3790,1005 3840,1005 3890,1005 3940,1005 3990,1005 4040,1005 4090,1005 4140,1005 4190,1005 525,1020 955,1065 1005,1065 1055,1065 1105,1065 1155,1065 1205,1065 1255,1065 525,1070 525,1120 525,1170 525,1220 525,1270 1850,1280 1900,1280 1950,1280 2000,1280 2050,1280 2100,1280 2150,1280 2200,1280 2250,1280 2300,1280 525,1320 3465,1330 3515,1330 3565,1330 3615,1330 3665,1330 3715,1330 3765,1330 3815,1330 3865,1330 3915,1330 955,1340 1005,1340 1055,1340 1105,1340 1155,1340 1205,1340 1255,1340 525,1370 4455,1400 4505,1400 4555,1400 4605,1400 4655,1400 4705,1400 4755,1400 4805,1400 4855,1400 4905,1400 525,1420 4455,1470 4505,1470 4555,1470 4605,1470 4655,1470 4705,1470 4755,1470 4805,1470 4855,1470 4905,1470 525,1540 4455,1545 4505,1545 4555,1545 4605,1545 4655,1545 4705,1545 4755,1545 4805,1545 4855,1545 4905,1545 3190,1550 3240,1550 3290,1550 3340,1550 3390,1550 3440,1550 3490,1550 3540,1550 3590,1550 3640,1550 525,1590 1850,1620 1900,1620 1950,1620 2000,1620 2050,1620 2100,1620 2150,1620 2200,1620 2250,1620 2300,1620 525,1640 525,1690 525,1740 3390,1770 3440,1770 3490,1770 3540,1770 3590,1770 3640,1770 3690,1770 3740,1770 3790,1770 3840,1770 525,1790 955,1825 1005,1825 1055,1825 1105,1825 1155,1825 1205,1825 1255,1825 525,1840 525,1890 525,1940 525,1990 3195,2035 3245,2035 3295,2035 3345,2035 3395,2035 3445,2035 3495,2035 3545,2035 3595,2035 3645,2035 2175,2040 2225,2040 2275,2040 2325,2040 2375,2040 2425,2040 2475,2040 3300,2225 2805,2245 2855,2265 3300,2275 2805,2295 2390,2305 2490,2305 2855,2315 3300,2325 530,2330 2805,2345 2390,2355 2490,2355 3530,2355 3580,2355 3630,2355 3680,2355 3730,2355 3780,2355 3830,2355 3880,2355 3930,2355 3980,2355 2855,2365 3300,2375 530,2380 2805,2395 2390,2405 2490,2405 2855,2415 980,2425 1030,2425 1080,2425 1130,2425 1180,2425 1230,2425 1280,2425 3300,2425 530,2430 2805,2445 2390,2455 2490,2455 2855,2465 3300,2475 530,2480 2805,2495 2390,2505 2490,2505 2855,2515 3300,2525 530,2530 2805,2545 3795,2550 2390,2555 2490,2555 2855,2565 3300,2575 530,2580 2805,2595 2390,2605 2490,2605 2855,2615 3300,2625 530,2630 2805,2645 2390,2655 2490,2655 2855,2665 3300,2675 530,2680 2805,2695 2390,2705 2490,2705 2855,2715 530,2730 2390,2755 2490,2755 530,2780 970,2780 1020,2780 1070,2780 1120,2780 1170,2780 1220,2780 1270,2780 3240,2795 3240,2845 1585,2880 1635,2880 1685,2880 1735,2880 1785,2880 1835,2880 1885,2880 1935,2880 1985,2880 2035,2880 3240,2895 530,2910 3240,2945 530,2960 970,2960 1020,2960 1070,2960 1120,2960 1170,2960 1220,2960 1270,2960 3240,2995 530,3010 3240,3045 530,3060 2025,3090 2075,3090 2125,3090 2175,3090 2225,3090 2275,3090 2325,3090 2375,3090 2425,3090 2475,3090 3240,3095 530,3110 3240,3145 530,3160 2025,3160 2075,3160 2125,3160 2175,3160 2225,3160 2275,3160 2325,3160 2375,3160 2425,3160 2475,3160 3240,3195 530,3210 3240,3245 530,3260 530,3310 530,3360 960,3365 1010,3365 1060,3365 1110,3365 1160,3365 1210,3365 1260,3365

## Polygon pours and split planes (outlines as drawn)
GND on Bottom Layer "NONET_L02_P009" (solid, remove dead copper, shelved, pour order 9): 20,3985 5985,3985 5985,20 5980,25 20,25
GND on Top Layer "NONET_L01_P010" (solid, shelved, pour order 10): 20,3985 5985,3985 5985,20 25,20 20,25

## Silkscreen, mask and mechanical layers (free items; w line width, h text height)
Top Overlay:
  text "VDDA" at 2870,3665 h39.37 r90
  text "VDDRF" at 2975,3665 h39.37 r90
  text "VDDD" at 3075,3665 h39.37 r90
  text "VDDPA" at 3185,3655 h39.37 r90
  text "ADCIN" at 3275,3655 h39.37 r90
  text "ADC200MV" at 3375,3655 h39.37 r90
  text "VPLUS" at 125,2150 h39.37
  text "5V" at 480,2150 h39.37
  text "GND" at 125,2050 h39.37
  text "SCAN_IN" at 5400,1890 h39.37
  text "SCAN_OUT" at 5400,1785 h39.37
  text "SCIO0" at 5400,1685 h39.37
  text "LOAD" at 5390,1575 h39.37
  text "DIFFCLK-" at 5390,1485 h39.37
  text "DIFFCLK+" at 5390,1385 h39.37
  text "SCMUXSEL" at 5390,1280 h39.37